# Altium PCB PCB1.PcbDoc (part 1 of 2)
Units mil, origin at the board's own origin, x right, y up, seen from the top; angles counter-clockwise.
Board outline 1500 x 1500 mil, 2 copper layers (Top Layer, Bottom Layer); 49 components, 35 nets, 276 pads, 49 vias.
Unrouted connection lines stored in the file: 2.
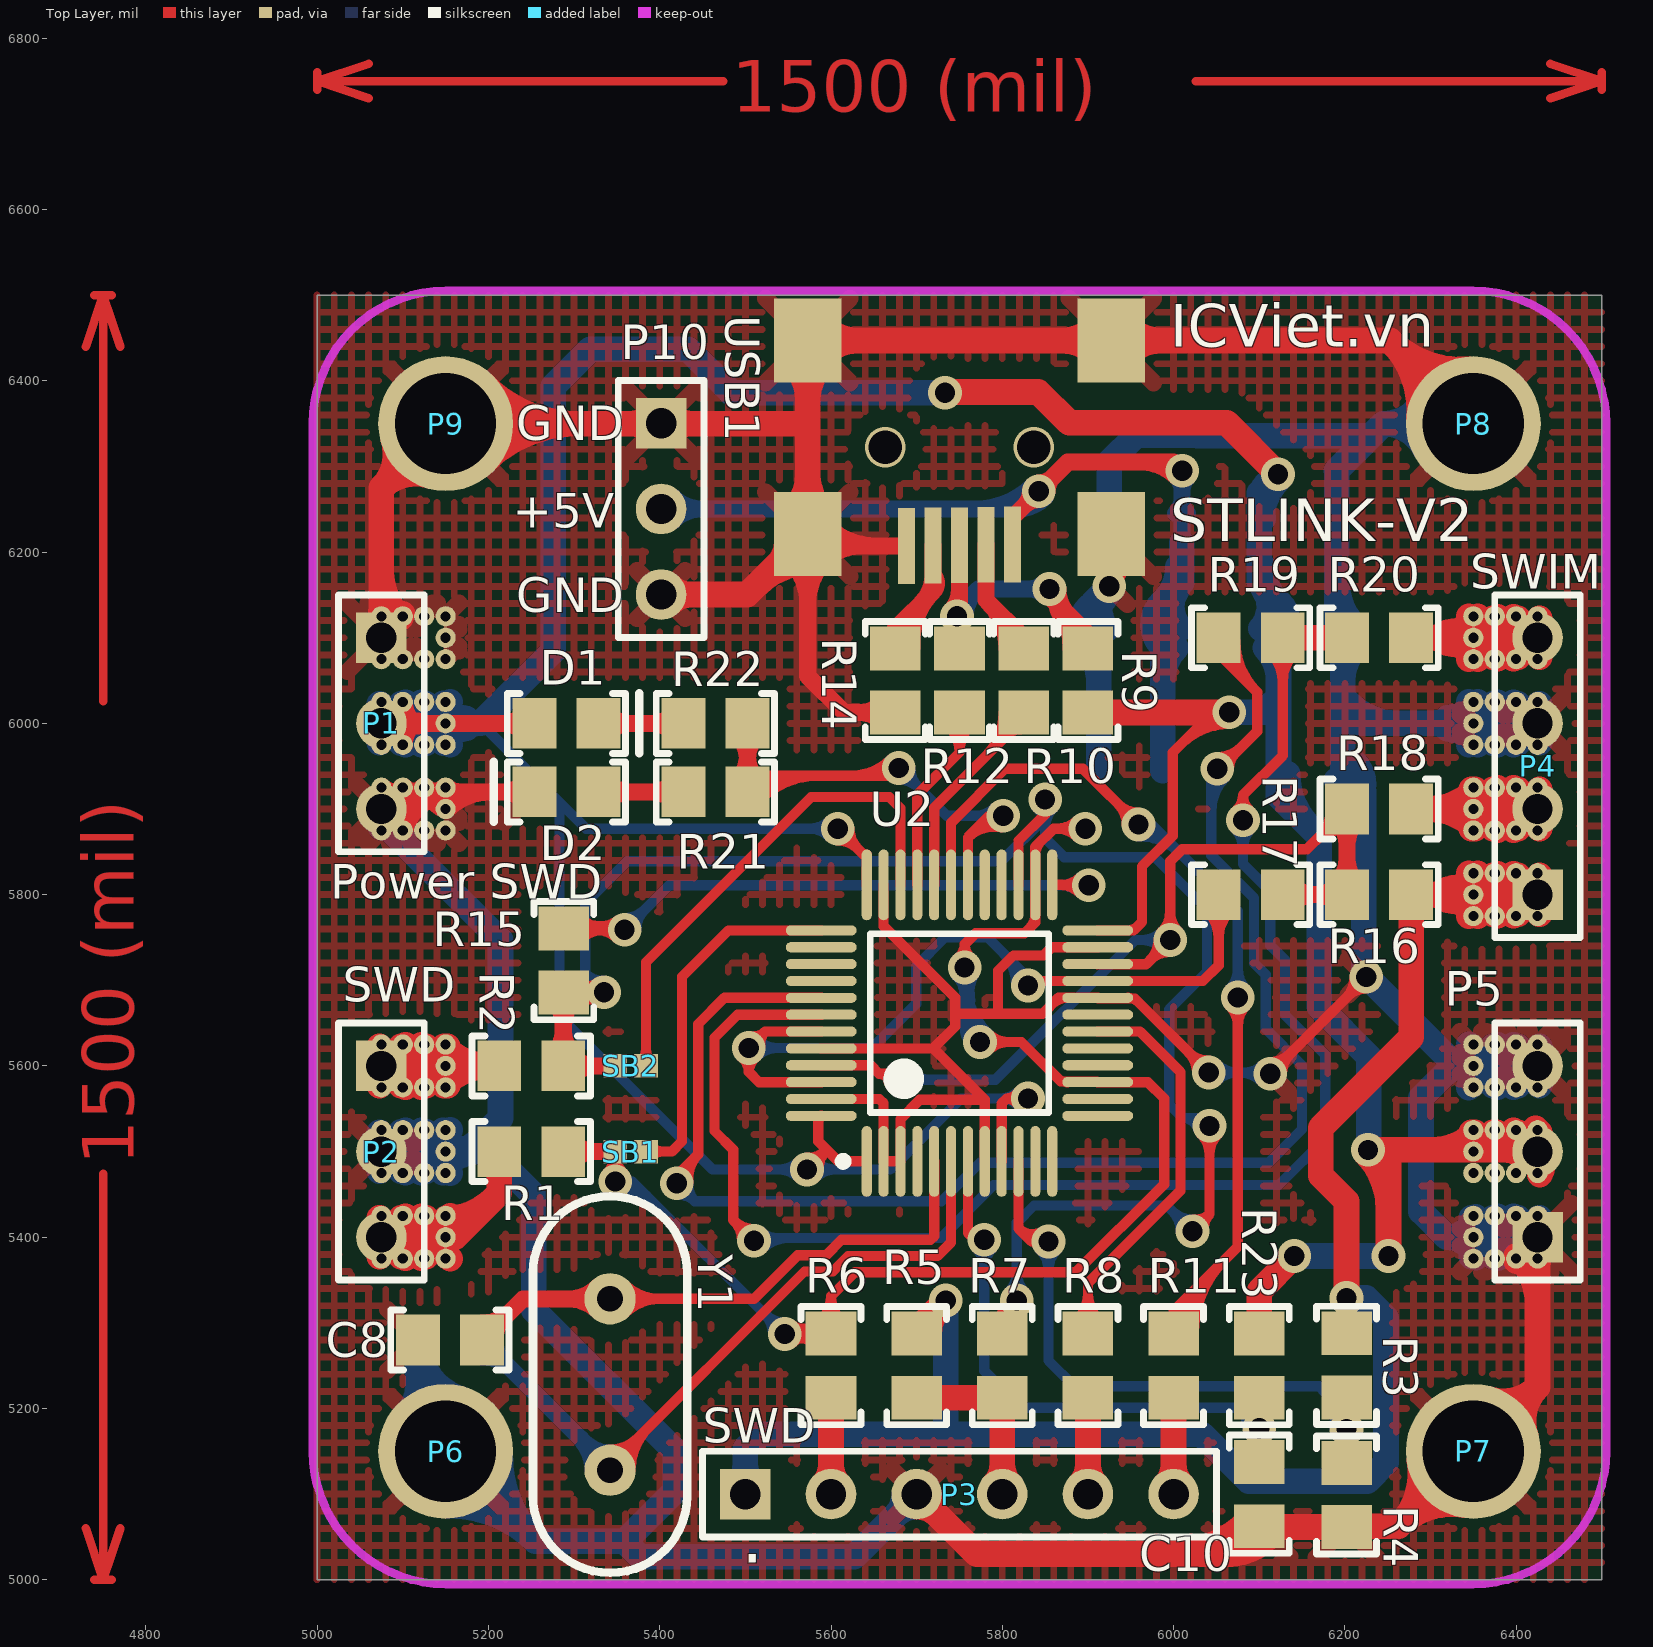
[diagram p0: Top Layer view]
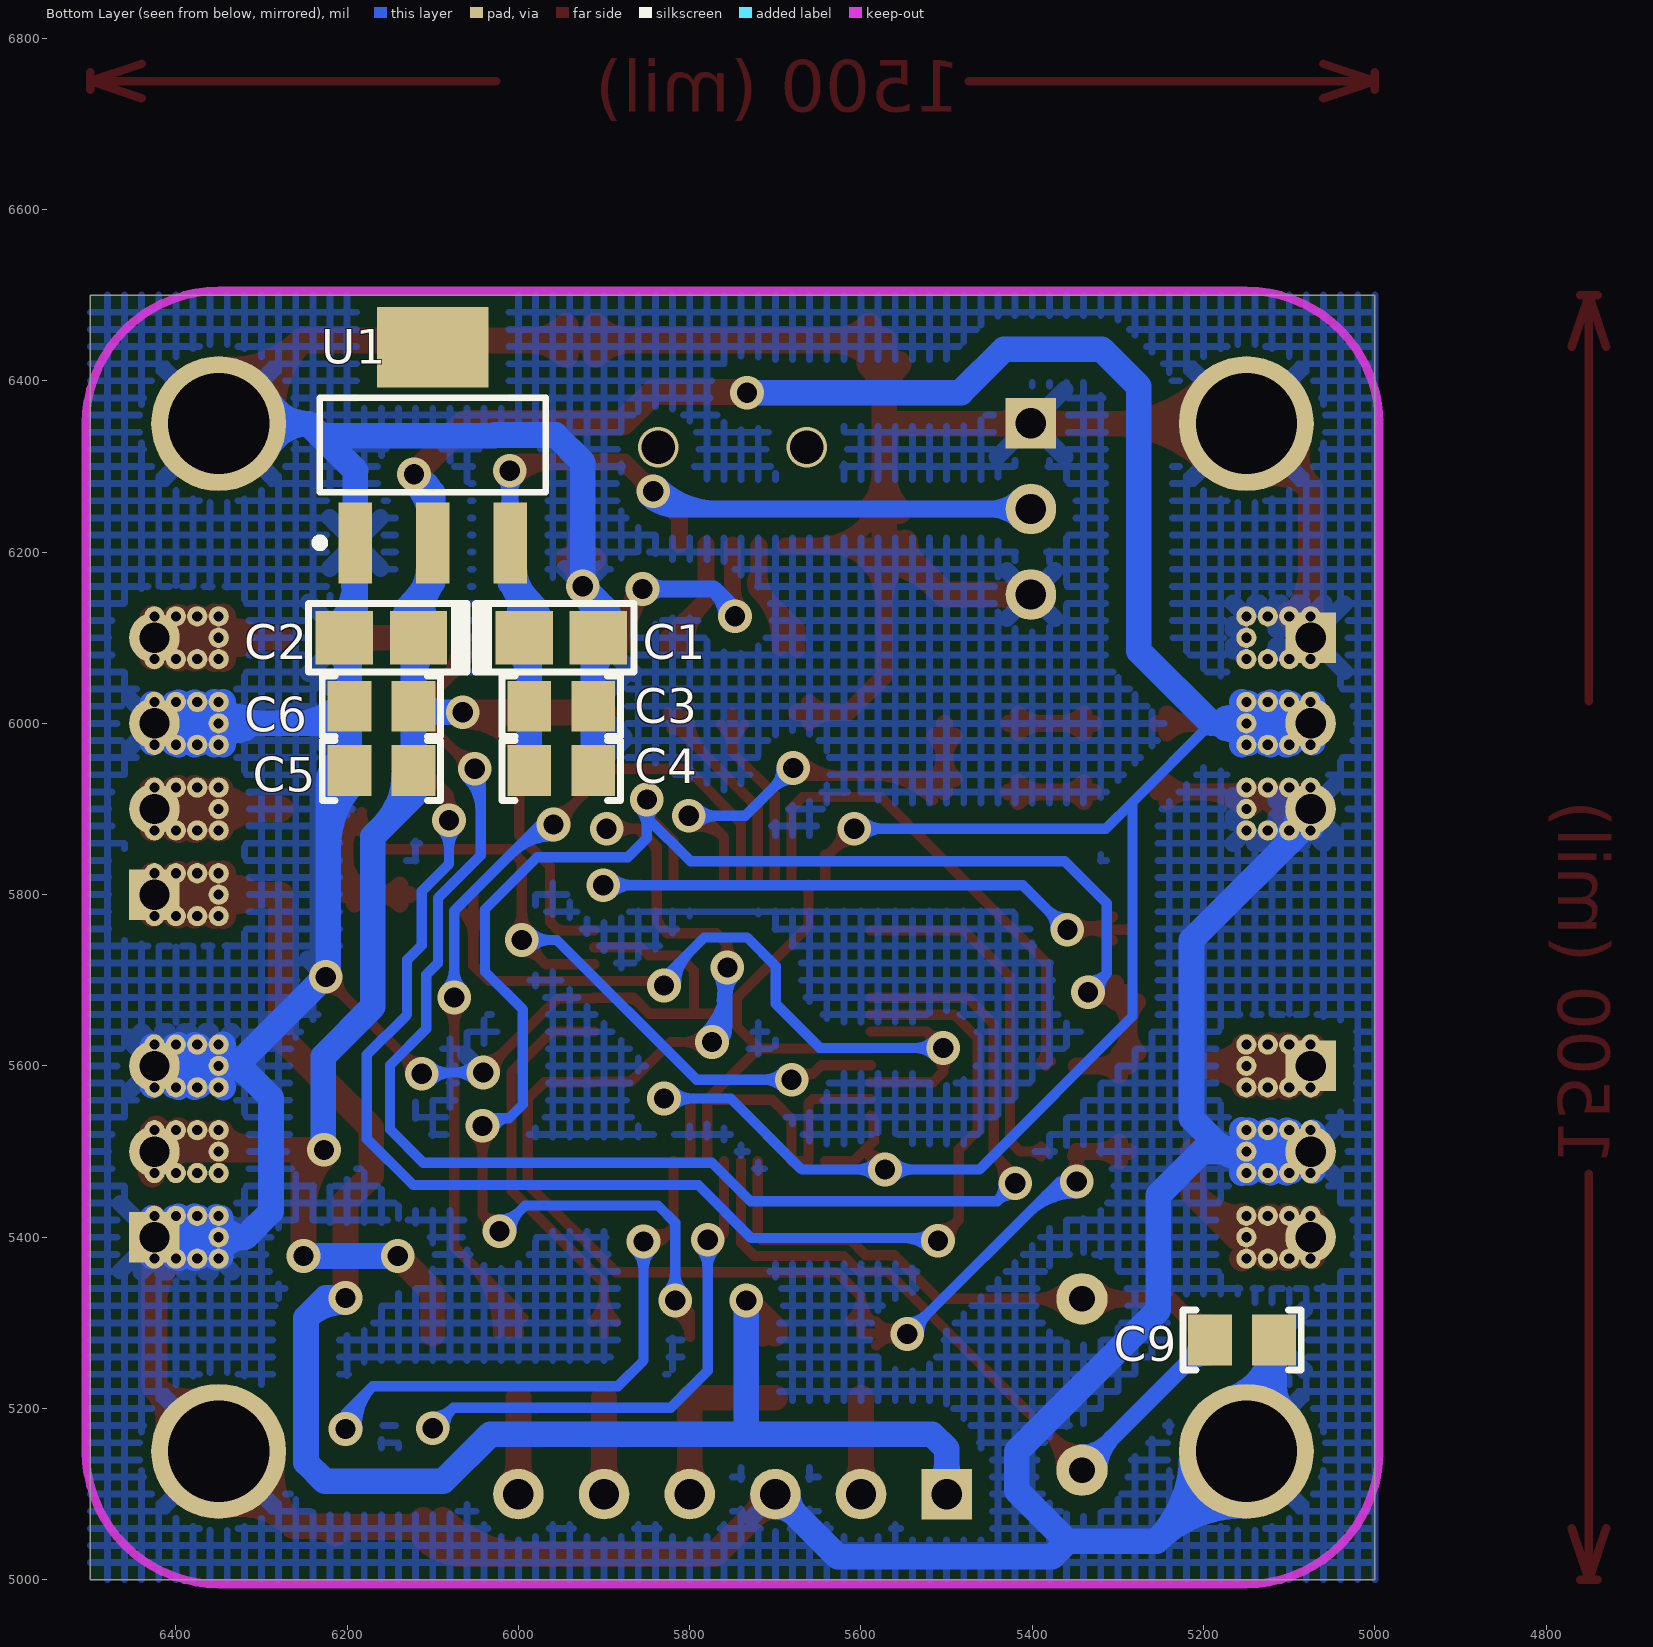
[diagram p1: Bottom Layer view, seen from below]

## Layer stack, top to bottom
Top Solder: solder mask 0.4, Solder Resist, Dk 3.5
Top Layer: signal copper 1.4
Dielectric1: dielectric 12.6, FR-4, Dk 4.8
Bottom Layer: signal copper 1.4
Bottom Solder: solder mask 0.4, Solder Resist, Dk 3.5

## Board outline
5000,6500 6500,6500 6500,5000 5000,5000

## Design rules (kind name [scope] priority, off if disabled: settings)
Clearance Clearance_1 [InPolygon] p1: gap=20
Clearance [All] p2: gap=7
PlaneConnect [All] p1: planeconnectstyle=Relief reliefexpansion=20 reliefentries=4 reliefconductorwidth=20 reliefairgap=10
PolygonConnect [All] p1: connectstyle=Relief reliefconductorwidth=20 reliefentries=4 polygonreliefangle="45 Angle" airgapwidth=10
RoutingVias [All] p1: holewidth=23.62 width=39.37 viastyle="Through Hole" minholewidth=23.62 minwidth=39.37 maxholewidth=23.62 maxwidth=39.37
SolderMaskExpansion [All] p1: expansion=4
Width [All] p1: maxlimit=50 minlimit=10 preferedwidth=10 minimp=50.000000 maximp=50.000000 favimp=50.000000
28 further rules are at their usual default settings.

## Components (designator, comment, footprint, x,y, rotation, side; value= is the part's Value field where it differs from the comment)
C1 "10uF" "C Tantalum S.A" 5950,6100 r180 bottom
C2 "10uF" "C Tantalum S.A" 6160,6100 r0 bottom
C3 "104" C-0805 5950,6020 r0 bottom
C4 "100pF" C-0805 5950,5945 r0 bottom
C5 "100pF" C-0805 6160,5945 r180 bottom
C6 "104" C-0805 6160,6020 r180 bottom
C8 "20p" C-0805 5155,5280 r180 top
C9 "20p" C-0805 5155,5280 r180 bottom
C10 "104" C-0805 6100,5100 r270 top
D1 "LED" LED-0805 5291,6000 r0 top
D2 "LED" LED-0805 5291,5920 r180 top
P1 "Power SWD" HDR1X3 5075,6100 r270 top
P2 "SWD" HDR1X3 5075,5600 r270 top
P3 "SWD" HDR1X6 5500,5100 r0 top
P4 "SWIM" HDR1X4 6425,5800 r90 top
P5 "Power SWIM" HDR1X3 6425,5400 r90 top
P6 "Drill" Drill 5150,5150 r0 top
P7 "Drill" Drill 6350,5150 r0 top
P8 "Drill" Drill 6350,6350 r0 top
P9 "Drill" Drill 5150,6350 r0 top
P10 "+5V" HDR1X3 5401.57,6350.39 r270 top
R1 "22" R-0805 5250,5500 r0 top
R2 "22" R-0805 5250,5600 r0 top
R3 "4.7K" R-0805 6202,5250.4 r90 top
R4 "4.7K" R-0805 6202,5099 r270 top
R5 "10K" R-0805 5700,5250 r90 top
R6 "22" R-0805 5600,5250 r90 top
R7 "22" R-0805 5800,5250 r90 top
R8 "22" R-0805 5900,5250 r90 top
R9 "1.5K" R-0805 5900,6050 r270 top
R10 "0" R-0805 5825,6050 r270 top
R11 "22" R-0805 6000,5250 r90 top
R12 "0" R-0805 5750,6050 r270 top
R14 "100K" R-0805 5675,6050 r270 top
R15 "100" R-0805 5288,5723 r270 top
R16 "680" R-0805 6240,5800 r0 top
R17 "220" R-0805 6090,5800 r0 top
R18 "47" R-0805 6240,5900 r0 top
R19 "220" R-0805 6090,6100 r0 top
R20 "47" R-0805 6240,6100 r0 top
R21 "330" R-0805 5465,5920 r0 top
R22 "330" R-0805 5465,6000 r0 top
R23 "100K" R-0805 6100,5250 r270 top
SB1 "SB" SB 5366,5500 r180 top
SB2 "SB" SB 5366,5600 r180 top
U1 "LM1117MPX-3.3" SOT223_N 6100,6325 r90 bottom
U2 "STM32F103C8T6" LQFP48_M 5750,5650 r90 top
USB1 "USB_M" USB_B_MINI_SMD 5812,6209 r0 top
Y1 "8Mhz" XTAL 5342,5228 r90 top

## Footprints (in the part's own frame and the unit in brackets; to place one, negate y for a bottom-side part, rotate by r counter-clockwise, add the part's x,y. Pads: shape width x height; smd on the part's side, far side on the other; paste and mask are expansions set on the pad)
"C Tantalum S.A" [mm] "Chip Capacitor; Body 2.54 x 1.27 mm (LxW typ)"
  rect 1.7x1.6 smd: 1(-1.1,0) 2(1.1,0)
  silkscreen extent -2.54,-1.02 2.16,1.02, body extent -1.6,-0.8 1.6,0.8, height 1.6
C-0805 [mm] "Chip Resistor; Body 2 x 1.2 mm (LxW typ)"
  rect 1.3x1.5 smd: 1(-0.95,0) 2(0.95,0)
  silkscreen extent -1.75,-0.89 1.75,0.89, body extent -1,-0.56 1,0.64, height 1.23
Drill [mm] "Generic Antenna; 1 Lead"
  round 4 hole 3: 1(0,0)
HDR1X3 [mm] "Connector; Header; 3 Position"
  rect 1.5x1.5 hole 0.9: 1(0,0)
  round 1.5 hole 0.9: 2(2.54,0) 3(5.08,0)
  silkscreen extent -1.27,-1.27 6.35,1.27, body extent -1.27,-1.27 6.35,1.27, height 5.99
HDR1X4 [mm] "Connector; Header; 4 Position"
  rect 1.5x1.5 hole 0.9: 1(0,0)
  round 1.5 hole 0.9: 2(2.54,0) 3(5.08,0) 4(7.62,0)
  silkscreen extent -1.27,-1.27 8.89,1.27, body extent -1.27,-1.27 8.89,1.27, height 8.5
HDR1X6 [mm] "Connector; Header; 6 Position"
  rect 1.5x1.5 hole 0.9: 1(0,0)
  round 1.5 hole 0.9: 2(2.54,0) 3(5.08,0) 4(7.62,0) 5(10.16,0) 6(12.7,0)
  silkscreen extent -1.27,-1.27 13.97,1.27, body extent -1.27,-1.27 13.97,1.27, height 8.5
LED-0805 [mm] "Chip Resistor; Body 2 x 1.2 mm (LxW typ)"
  rect 1.3x1.5 smd: 1(-0.95,0) 2(0.95,0)
  silkscreen extent -1.75,-0.89 2.16,0.89, body extent -1.03,-0.4 1.03,0.51, height 0.85
LQFP48_M [mm] "Thin QFP, 48-Leads, Body 7x7mm, Pitch 0.5mm, IPC Low Density"
  oval 2.1x0.3 smd: 1(-4.1,2.75) 2(-4.1,2.25) 3(-4.1,1.75) 4(-4.1,1.25) 5(-4.1,0.75) 6(-4.1,0.25) 7(-4.1,-0.25) 8(-4.1,-0.75) 9(-4.1,-1.25) 10(-4.1,-1.75) 11(-4.1,-2.25) 12(-4.1,-2.75) 25(4.1,-2.75) 26(4.1,-2.25) 27(4.1,-1.75) 28(4.1,-1.25) 29(4.1,-0.75) 30(4.1,-0.25) 31(4.1,0.25) 32(4.1,0.75) 33(4.1,1.25) 34(4.1,1.75) 35(4.1,2.25) 36(4.1,2.75)
  oval 0.3x2.1 smd: 13(-2.75,-4.1) 14(-2.25,-4.1) 15(-1.75,-4.1) 16(-1.25,-4.1) 17(-0.75,-4.1) 18(-0.25,-4.1) 19(0.25,-4.1) 20(0.75,-4.1) 21(1.25,-4.1) 22(1.75,-4.1) 23(2.25,-4.1) 24(2.75,-4.1) 37(2.75,4.1) 38(2.25,4.1) 39(1.75,4.1) 40(1.25,4.1) 41(0.75,4.1) 42(0.25,4.1) 43(-0.25,4.1) 44(-0.75,4.1) 45(-1.25,4.1) 46(-1.75,4.1) 47(-2.25,4.1) 48(-2.75,4.1)
  silkscreen extent -4.22,-2.65 2.65,3.57, body extent -4.39,-4.39 4.39,4.39, height 1.56
R-0805 [mm] "Chip Resistor; Body 2 x 1.2 mm (LxW typ)"
  rect 1.3x1.5 smd: 1(-0.95,0) 2(0.95,0)
  silkscreen extent -1.75,-0.89 1.75,0.89, body extent -1,-0.63 1,0.62, height 0.45
SB [mm] "Chip Resistor; Body 1 x 0.5 mm (LxW typ)"
  rect 0.7x0.7 smd: 1(-0.457,0) 2(0.457,0)
SOT223_N [mm] "SOT223, 4-Leads, Body 6.5x3.5mm, Pitch 2.3mm, Lead Span 7mm, IPC Medium Density"
  rect 2.4x1 smd: 1(-2.9,2.3) 2(-2.9,0) 3(-2.9,-2.3)
  rect 2.4x3.3 smd: 4(2.9,0)
  silkscreen extent -3.02,-3.35 1.4,3.48, body extent -3.47,-3.25 3.47,3.25, height 1.68
USB_B_MINI_SMD [mm]
  rect 0.5x2.25 smd: 1(0,0) 2(-0.787,-0.013) 3(-1.575,-0.025) 4(-2.362,-0.038) 5(-3.15,-0.051)
  rect 2x2.5 smd: 6(-6.075,0.305) 7(-6.071,6.045) 8(2.929,6.045) 9(2.925,0.305)
  body extent -6.92,-0.37 3.78,8.83, height 3.95
XTAL [mil]
  round 60 hole 30: 1(100,0) 2(-100,0)
  silkscreen extent -220,-90 220,90, body extent -220,-90 220,94, height 145

## Part data
C1 C2: library part "C Tantalum S.A", "Midget Conformal Coated Solid Tantalum Chip Capacitor: 1.5uF, 20% Tolerance, 15 WVDC @ +85°C, Surge = 20V"
C3 C4 C5 C6 C8 C9 C10: library part "Cap Ceramic", "Capacitor (Semiconductor SIM Model)"
D1 D2: "Typical INFRARED GaAs LED"
P1 P2 P5 P10: library part "Header 3", "Header, 3-Pin"
P3: library part "Header 6", "Header, 6-Pin"
P4: library part "Header 4", "Header, 4-Pin"
P6 P7 P8 P9: library part "Header 1", "Header, 1 Pin"
R1 R2 R3 R4 R5 R6 R7 R8 R9 R10 R11 R12 R14 R15 R16 R17 R18 R19 R20 R21 R22 R23: library part RES, "Rectangular Thick Film Chip Resistor, 10 Ohm to 1M Ohm Range, 0.1% and 0.5% Tolerance, 1/8W"
U1: "800mA Low-Dropout Linear Regulator, 4-pin SOT-223"
U2: "STM32 ARM-based 32-bit MCU with 64 Kbytes Flash, 48-pin LQFP, Industrial Temperature"
Y1: library part XTAL, "Crystal Oscillator"

## Free pads (board coordinates)
  round 23.62 hole 11.81: 1(5075,5375) 1(5075,5425) 1(5075,5475) 1(5075,5525) 1(5075,5575) 1(5075,5625) 1(5075,5875) 1(5075,5925) 1(5075,5975) 1(5075,6025) 1(5075,6075) 1(5075,6125) 1(5100,5375) 1(5100,5425) 1(5100,5475) 1(5100,5525) 1(5100,5575) 1(5100,5625) 1(5100,5875) 1(5100,5925) 1(5100,5975) 1(5100,6025) 1(5100,6075) 1(5100,6125) 1(5125,5375) 1(5125,5425) 1(5125,5475) 1(5125,5525) 1(5125,5575) 1(5125,5625) 1(5125,5875) 1(5125,5925) 1(5125,5975) 1(5125,6025) 1(5125,6075) 1(5125,6125) 1(5150,5375) 1(5150,5400) 1(5150,5425) 1(5150,5475) 1(5150,5500) 1(5150,5525) 1(5150,5575) 1(5150,5600) 1(5150,5625) 1(5150,5875) 1(5150,5900) 1(5150,5925) 1(5150,5975) 1(5150,6000) 1(5150,6025) 1(5150,6075) 1(5150,6100) 1(5150,6125) 1(6350,5375) 1(6350,5400) 1(6350,5425) 1(6350,5475) 1(6350,5500) 1(6350,5525) 1(6350,5575) 1(6350,5600) 1(6350,5625) 1(6350,5775) 1(6350,5800) 1(6350,5825) 1(6350,5875) 1(6350,5900) 1(6350,5925) 1(6350,5975) 1(6350,6000) 1(6350,6025) 1(6350,6075) 1(6350,6100) 1(6350,6125) 1(6375,5375) 1(6375,5425) 1(6375,5475) 1(6375,5525) 1(6375,5575) 1(6375,5625) 1(6375,5775) 1(6375,5825) 1(6375,5875) 1(6375,5925) 1(6375,5975) 1(6375,6025) 1(6375,6075) 1(6375,6125) 1(6400,5375) 1(6400,5425) 1(6400,5475) 1(6400,5525) 1(6400,5575) 1(6400,5625) 1(6400,5775) 1(6400,5825) 1(6400,5875) 1(6400,5925) 1(6400,5975) 1(6400,6025) 1(6400,6075) 1(6400,6125) 1(6425,5375) 1(6425,5425) 1(6425,5475) 1(6425,5525) 1(6425,5575) 1(6425,5625) 1(6425,5775) 1(6425,5825) 1(6425,5875) 1(6425,5925) 1(6425,5975) 1(6425,6025) 1(6425,6075) 1(6425,6125)

## Via types
v1: diameter 39.37, hole 23.62, Top Layer to Bottom Layer, tented both sides, 47 vias
v2: diameter 47.24, hole 39.37, Top Layer to Bottom Layer, tented both sides, 2 vias

## Nets (pads, with @x,y where several pads share a name; then routed paths per layer and width w, separated by ;. In a path a pad name is that pad's centre, name@x,y a point inside that pad or via, vN(x,y) a via of type N, cw(c..) or ccw(c..) an arc to the next point about the centre after c; other vN are vias at no path point)
+3.3V: C2.1 C5.2 C6.2 D1.1 P1.2 P5.2 pad.1@5075,5975 pad.1@5075,6025 pad.1@5100,5975 pad.1@5100,6025 pad.1@5125,5975 pad.1@5125,6025 pad.1@5150,5975 pad.1@5150,6000 pad.1@5150,6025 pad.1@6350,5475 pad.1@6350,5500 pad.1@6350,5525 pad.1@6375,5475 pad.1@6375,5525 pad.1@6400,5475 pad.1@6400,5525 pad.1@6425,5475 pad.1@6425,5525 R9.2 R23.1 U1.2 U2.1 U2.9 U2.24 U2.36 U2.48 | length 8178.9
  Top Layer w12: v1(5572,5479) 5594.5,5501.5 ; v1@5572.37,5492.68 ccw(c5573.18,5522.82) 5594.5,5501.5 ; 5585,5533.31 cw(c5597,5533.31) U2.48@5588.52,5541.8 ; v1@5585.68,5479.37 cw(c5615.82,5480.18) 5594.5,5501.5 ; U2.48@5588.58,5541.73 5585,5538.15 5585,5512 5594.5,5502.5 ; v1@5608,5863.31 cw(c5608,5830.28) 5631.36,5853.64 cw(c5654.72,5877) v1@5621.69,5877 ; v1(5608,5877) 5641.73,5843.27 U2.36@5641.73,5811.42 ; 5635.78,5849.22 ccw(c5641.73,5855.18) U2.36@5641.73,5846.76 ; U2.1@5641.73,5488.58 5608.42,5488.58 5594.5,5502.5 ; U2.9@5799.21,5488.58 5799.21,5556.21 5805,5562 ; v1@5818.47,5554.63 ccw(c5805,5546.01) 5805,5562 ; v1@5818.47,5569.37 cw(c5805,5577.99) 5805,5562 ; v1(5830,5562) 5805,5562 ; U2.24@5911.42,5758.27 5953.27,5758.27 5963,5768 5963,5832.87 5999,5868.87 5999,5966 6045.6,6012.6 v1@6064.6,6012.6 ; U2.24@5946.85,5758.17 ccw(c5946.85,5773.44) 5957.64,5762.64 ; 6009.2,5976.2 cw(c6065,5920.41) v1@6065,5999.31 ; 6029.69,5996.69 cw(c6065,5961.38) v1@6065,6011.32 ; 5594.5,5501.5 5594.5,5502.5
  Top Layer w20: P1.2@5075,6000 pad.1@5150,6000 D1.1@5253.6,6000 ; P1.2@5088.81,5986.19 cw(c5122.14,5952.86) 5122.14,6000 cw(c5122.14,6047.14) P1.2@5088.81,6013.81 ; pad.1@5101.81,5975.03 cw(c5133.36,5975.48) 5117.59,6002.81 ; pad.1@5101.81,6024.97 ccw(c5133.36,6024.52) 5117.59,5997.19 ; D1.1@5242.57,5988.98 ccw(c5215.96,5962.36) 5215.96,6000 ccw(c5215.96,6037.64) D1.1@5242.57,6011.02
  Top Layer w30: v1(5733,6386) 5734,6387 5842,6387 5878,6351 6062,6351 v1(6122,6291) ; R9.2@5900,6012.6 v1@6064.6,6012.6 ; R23.1@6100,5287.4 6100,5337 v1(6141,5378) ; v1@6223.69,5498.69 cw(c6157.75,5432.75) 6251,5432.75 ; v1(6227,5502) 6259,5502 ; v1(6251,5378) 6251,5494 6259,5502 ; 6302.17,5502 ccw(c6302.17,5572.83) pad.1@6352.25,5522.75 ; 6327.17,5502 ccw(c6327.17,5572.83) pad.1@6377.25,5522.75 ; pad.1@6347.75,5522.75 ccw(c6397.83,5572.83) P5.2@6397.83,5502 ; pad.1@6352.17,5502 ccw(c6352.17,5572.83) pad.1@6402.25,5522.75 ; pad.1@6372.75,5522.75 ccw(c6422.83,5572.83) P5.2@6422.83,5502 ; 6377.17,5502 ccw(c6377.17,5572.83) pad.1@6427.25,5522.75 ; 6385.1,5502 cw(c6385.1,5460.1) P5.2@6414.73,5489.73 ; 6394.76,5502 ccw(c6394.76,5530.24) P5.2@6414.73,5510.27 ; pad.1@6396.85,5524.53 ccw(c6423,5528.44) P5.2@6423,5502 ; pad.1@6422.35,5526.77 ccw(c6440,5515) P5.2@6425,5500 ; pad.1@6422.69,5527.2 ccw(c6435.76,5514.76) P5.2@6423,5502 ; pad.1@6427.65,5473.23 ccw(c6410,5485) P5.2@6425,5500 ; pad.1@6427.88,5473.63 ccw(c6405.36,5484.36) P5.2@6423,5502 ; 6259,5502 P5.2@6423,5502 ; P5.2@6423,5502 P5.2@6425,5500
  Bottom Layer w12: 5191,6000 5283,5908 ; v1@5562.32,5469.32 ccw(c5538.96,5445.96) 5538.96,5479 ccw(c5538.96,5512.04) v1@5562.32,5488.68 ; v1@5581.68,5469.32 cw(c5605.04,5445.96) 5605.04,5479 cw(c5605.04,5512.04) v1@5581.68,5488.68 ; v1@5598.32,5867.32 ccw(c5574.96,5843.96) 5574.96,5877 ccw(c5574.96,5910.04) v1@5598.32,5886.68 ; v1(5608,5877) 5314,5877 5283,5908 ; v1@5820.32,5552.32 ccw(c5796.96,5528.96) 5796.96,5562 ccw(c5796.96,5595.04) v1@5820.32,5571.68 ; v1(5830,5562) 5752,5562 5669,5479 v1(5572,5479) 5462,5479 5283,5658 5283,5908
  Bottom Layer w30: pad.1@5072.75,5977.25 cw(c5127.66,5922.34) 5127.66,6000 cw(c5127.66,6077.66) pad.1@5072.75,6022.75 ; P1.2@5085.27,5989.73 cw(c5110.07,5964.93) 5110.07,6000 cw(c5110.07,6035.07) P1.2@5085.27,6010.27 ; pad.1@5097.66,5977.17 cw(c5150,5928.6) pad.1@5150,6000 ; pad.1@5097.66,6022.83 ccw(c5150,6071.4) pad.1@5150,6000 ; pad.1@5103.16,5975.43 ccw(c5075,5971.58) P1.2@5075,6000 ; pad.1@5103.16,6024.57 cw(c5075,6028.42) P1.2@5075,6000 ; 5119.87,5993.57 ccw(c5131.31,6033.63) pad.1@5151.55,5997.21 ; 5119.87,6006.43 cw(c5131.31,5966.37) pad.1@5151.55,6002.79 ; pad.1@5121.84,5975.43 cw(c5150,5971.58) pad.1@5150,6000 ; pad.1@5121.84,6024.57 ccw(c5150,6028.42) pad.1@5150,6000 ; pad.1@5127.34,5977.17 ccw(c5075,5928.6) P1.2@5075,6000 ; pad.1@5127.34,6022.83 cw(c5075,6071.4) P1.2@5075,6000 ; pad.1@5146.94,5999.12 cw(c5170.5,6005.92) pad.1@5155.25,6025.12 ; pad.1@5146.94,6000.88 ccw(c5170.5,5994.08) pad.1@5155.25,5974.88 ; pad.1@5147.36,5976.78 cw(c5191,5947.37) 5191,6000 ; pad.1@5147.36,6023.22 ccw(c5191,6052.63) 5191,6000 ; pad.1@5147.77,5977.22 ccw(c5130.86,5993.43) pad.1@5153.02,6001.04 ; pad.1@5147.77,6022.78 cw(c5130.86,6006.57) pad.1@5153.02,5998.96 ; pad.1@5148.41,5997.23 ccw(c5164.44,6025.16) 5174.5,5994.57 ; pad.1@5148.41,6002.77 cw(c5164.44,5974.84) 5174.5,6005.43 ; pad.1@5152.25,5977.25 ccw(c5097.34,5922.34) 5097.34,6000 ccw(c5097.34,6077.66) pad.1@5152.25,6022.75 ; v1(5733,6386) 5483,6386 5483,6387.08 5433.07,6437.01 5318.9,6437.01 5275.59,6393.7 5275.59,6084.59 5191,6000 ; v1(6065,6013) 6115.6,6013 C6.2@6122.6,6020 ; 6089.64,6013 ccw(c6089.64,6049.03) C6.2@6115.11,6023.55 ; U1.2@6100,6226.58 cw(c6186.42,6226.58) v1@6125.31,6287.69 ; 6100,6259.89 cw(c6126.79,6259.89) v1@6122.71,6286.37 ; C2.1@6102.17,6110.7 ccw(c6071.68,6136.68) U1.2@6100,6165 ; U1.2@6104.46,6181.85 ccw(c6140.32,6170.43) 6107.73,6151.61 ; U1.2@6104.64,6239.04 cw(c6165.37,6247.63) v1(6122,6291) 6100,6269 U1.2@6100,6210.83 U1.2@6100,6165 ; U1.2@6104.68,6183.16 ccw(c6157,6182.01) 6120,6145 ; C2.1@6107,6088.34 cw(c6069.33,6050.67) 6122.6,6050.67 ; C2.1@6107,6111.66 ccw(c6075.6,6143.06) 6120,6143.06 ; 6120,6136.59 ccw(c6155.25,6136.59) C2.1@6130.33,6111.66 ; 6122.98,6142.02 cw(c6096.49,6115.54) C2.1@6125,6091.24 ; C5.2@6133.19,5941.06 ccw(c6220.71,5941.06) 6158.82,5879.18 ; v1(6141,5378) v1(6251,5378) ; v1(6227,5502) 6228,5503 6228,5611 6170,5669 6170,5868 6122.6,5915.4 C5.2@6122.6,5945 C6.2@6122.6,6020 ; P1.2@5075,6000 pad.1@5150,6000 ; pad.1@5150,6000 5191,6000 ; U1.2@6100,6165 6120,6145 ; 6120,6145 6120,6103.31 C2.1@6116.69,6100 6122.6,6094.09 C6.2@6122.6,6020
+5V: C1.1 C3.2 C4.2 P10.2 U1.3 USB1.1 | length 1774.1
  Top Layer w20: USB1.1@5812,6209 5812,6240.51 v1(5842.52,6271.03) 5876.49,6305 6000,6305 v1(6010,6295) ; v1@5832.83,6271.03 cw(c5809.45,6271.03) 5825.99,6254.5 cw(c5842.52,6237.97) v1@5842.52,6261.35 ; v1@5842.52,6280.72 ccw(c5842.52,6304.1) 5859.05,6287.57 ccw(c5875.59,6271.03) v1@5852.2,6271.03 ; 5962.48,6305 cw(c5962.48,6247.48) v1@6003.15,6288.15
  Bottom Layer w20: P10.2@5401.57,6250.39 5821.88,6250.39 v1(5842.52,6271.03) ; P10.2@5415.38,6236.59 cw(c5448.72,6203.25) 5448.72,6250.39 cw(c5448.72,6297.54) P10.2@5415.38,6264.2 ; 5769.31,6250.39 ccw(c5769.31,6344.24) v1@5835.67,6277.88 ; 5817.6,6250.39 ccw(c5817.6,6295.95) v1@5849.81,6263.74 ; v1@5832.83,6271.03 cw(c5809.45,6271.03) 5825.99,6254.5 cw(c5842.52,6237.97) v1@5842.52,6261.35 ; U1.3@6002.6,6245.23 ccw(c5984.74,6263.1) 6010,6263.1 ; v1@6003.15,6288.15 cw(c5986.62,6271.62) 6010,6271.62 cw(c6033.38,6271.62) v1@6016.85,6288.15 ; U1.3@6009.45,6210.83 6010,6211.38 v1(6010,6295) ; 6010,6260.44 ccw(c6031.5,6260.44) U1.3@6016.3,6245.23
  Bottom Layer w30: C1.1@5979.67,6111.66 ccw(c5954.75,6136.59) 5990,6136.59 ; C1.1@5985.12,6091.1 cw(c6013.03,6115.55) 5986.79,6141.79 ; C4.2@5987.4,5945 C3.2@5987.4,6020 5987.4,6094.09 5990,6096.69 5990,6145 ; 5987.4,6050.67 cw(c6040.67,6050.67) C1.1@6003,6088.34 ; 5990,6143.06 ccw(c6034.4,6143.06) C1.1@6003,6111.66 ; 6002.01,6151.57 ccw(c5970.13,6169.98) U1.3@6005.01,6181.77 ; U1.3@6004.77,6183.06 cw(c5954.23,6180.78) 5990,6145 ; C1.1@6007.68,6110.87 cw(c6037.18,6136.72) U1.3@6009.45,6164.45 ; U1.3@6009.45,6210.83 U1.3@6009.45,6164.45 ; 5990,6145 U1.3@6009.45,6164.45